# EAGLE board Boards (EAGLE 6.1)
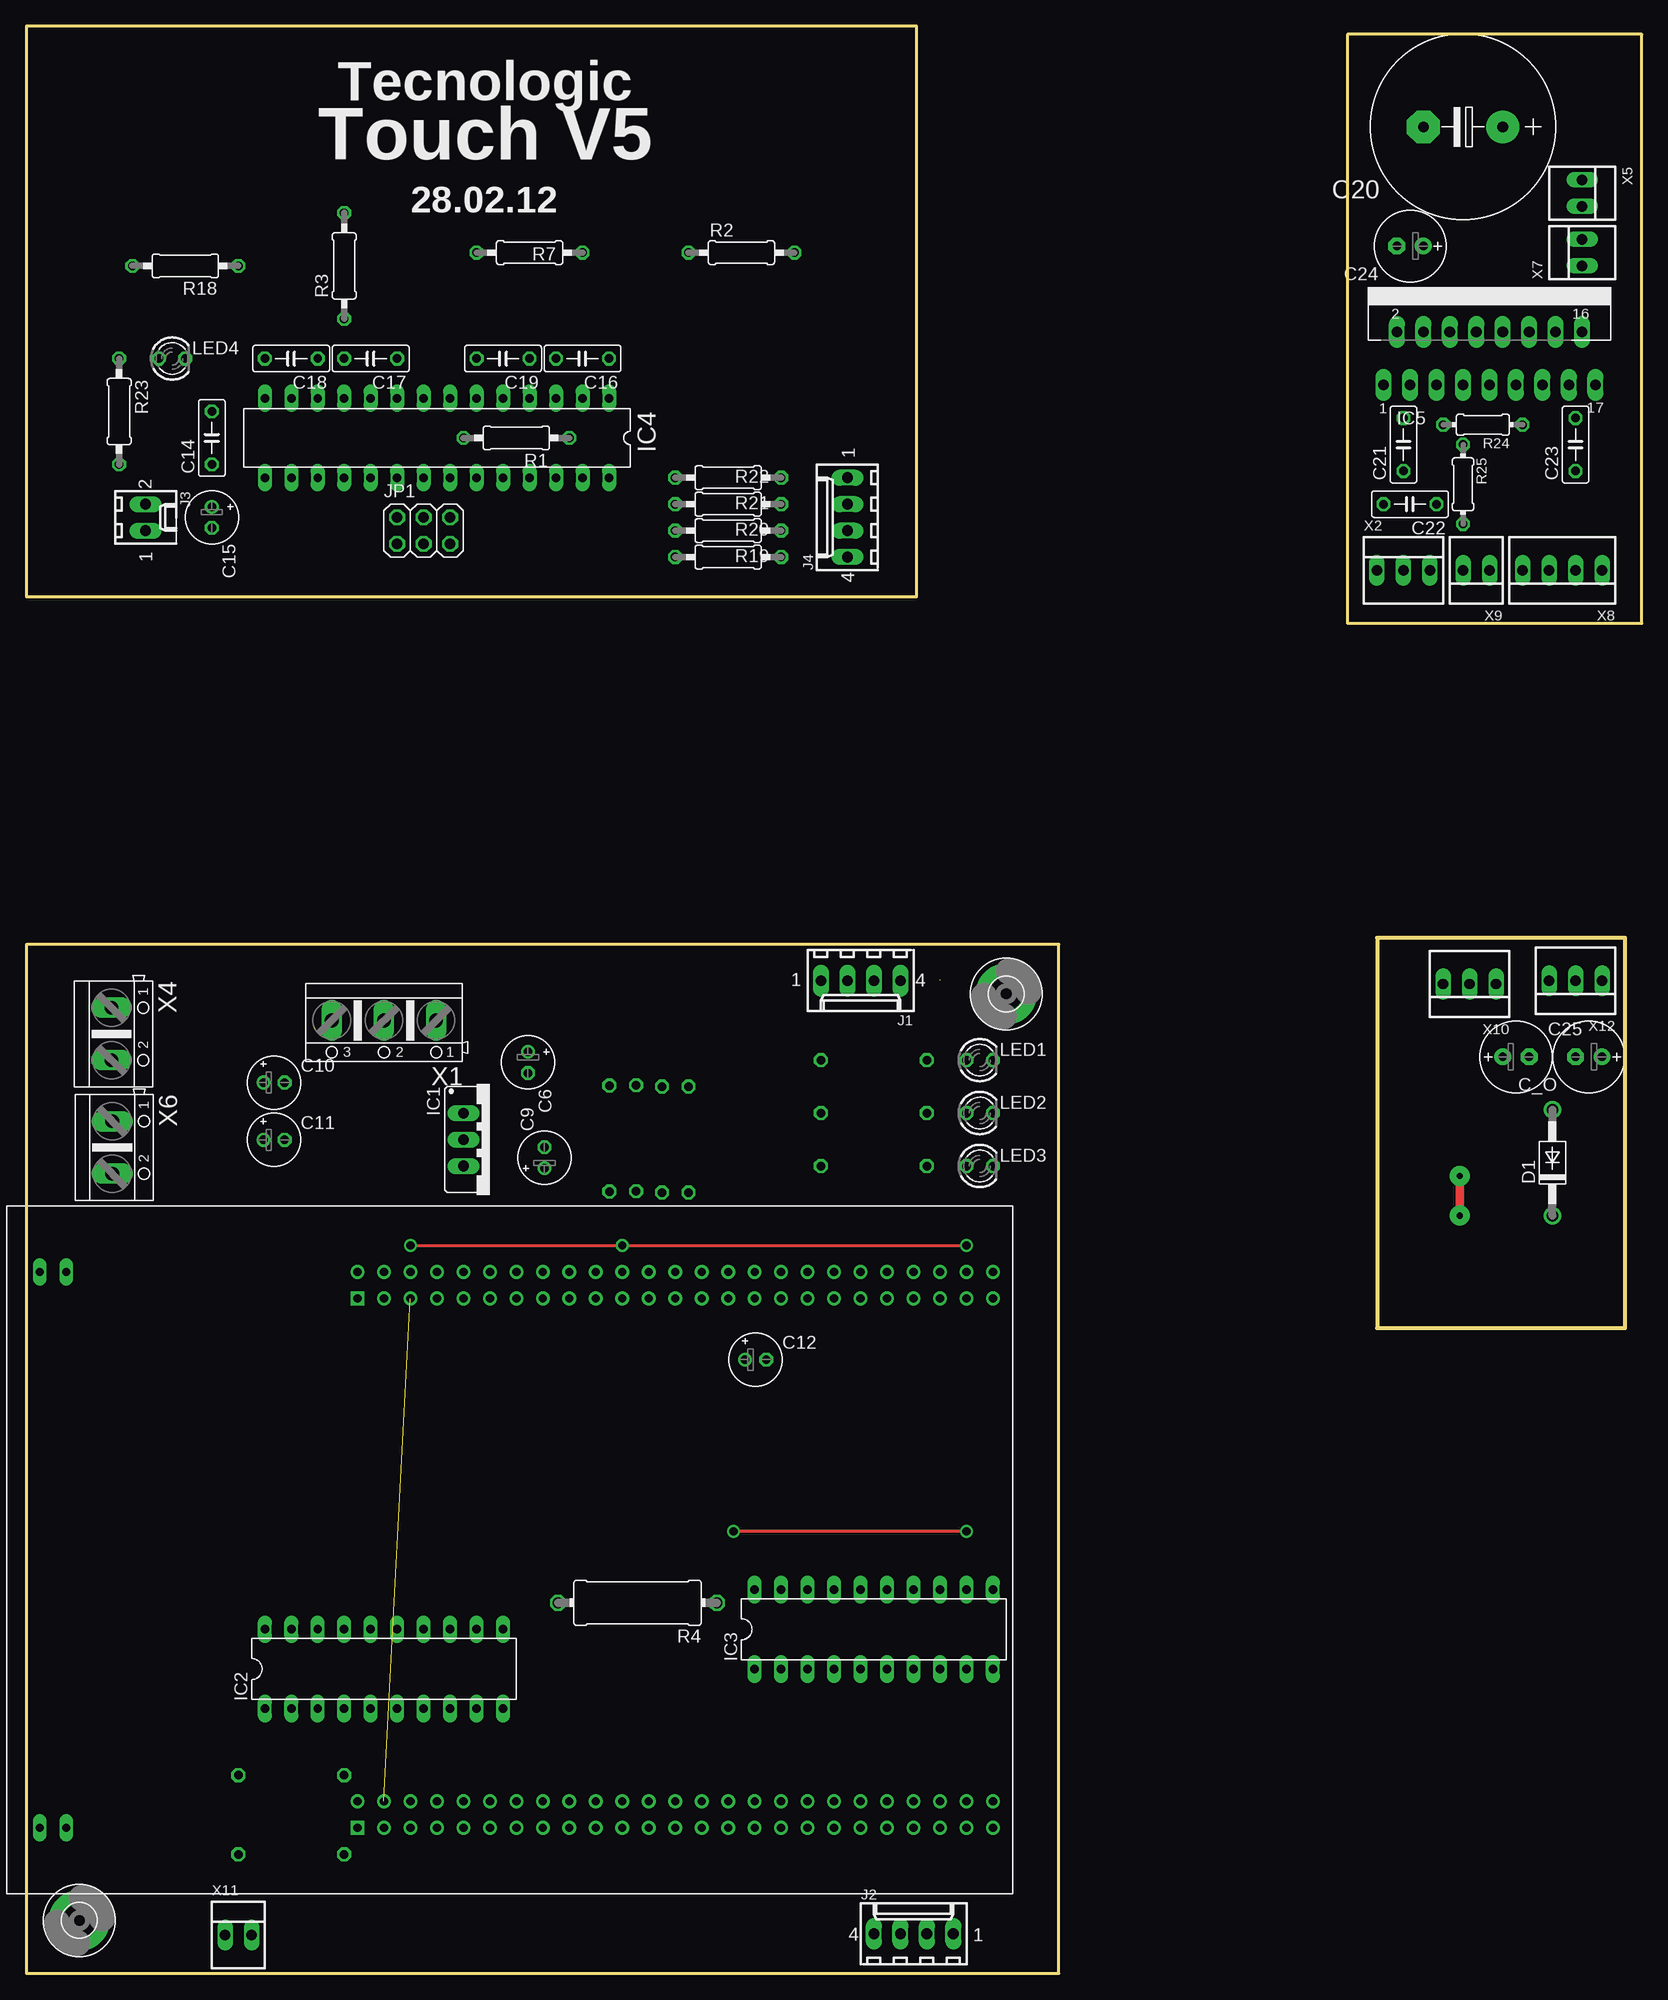
[diagram p0: board, top side]
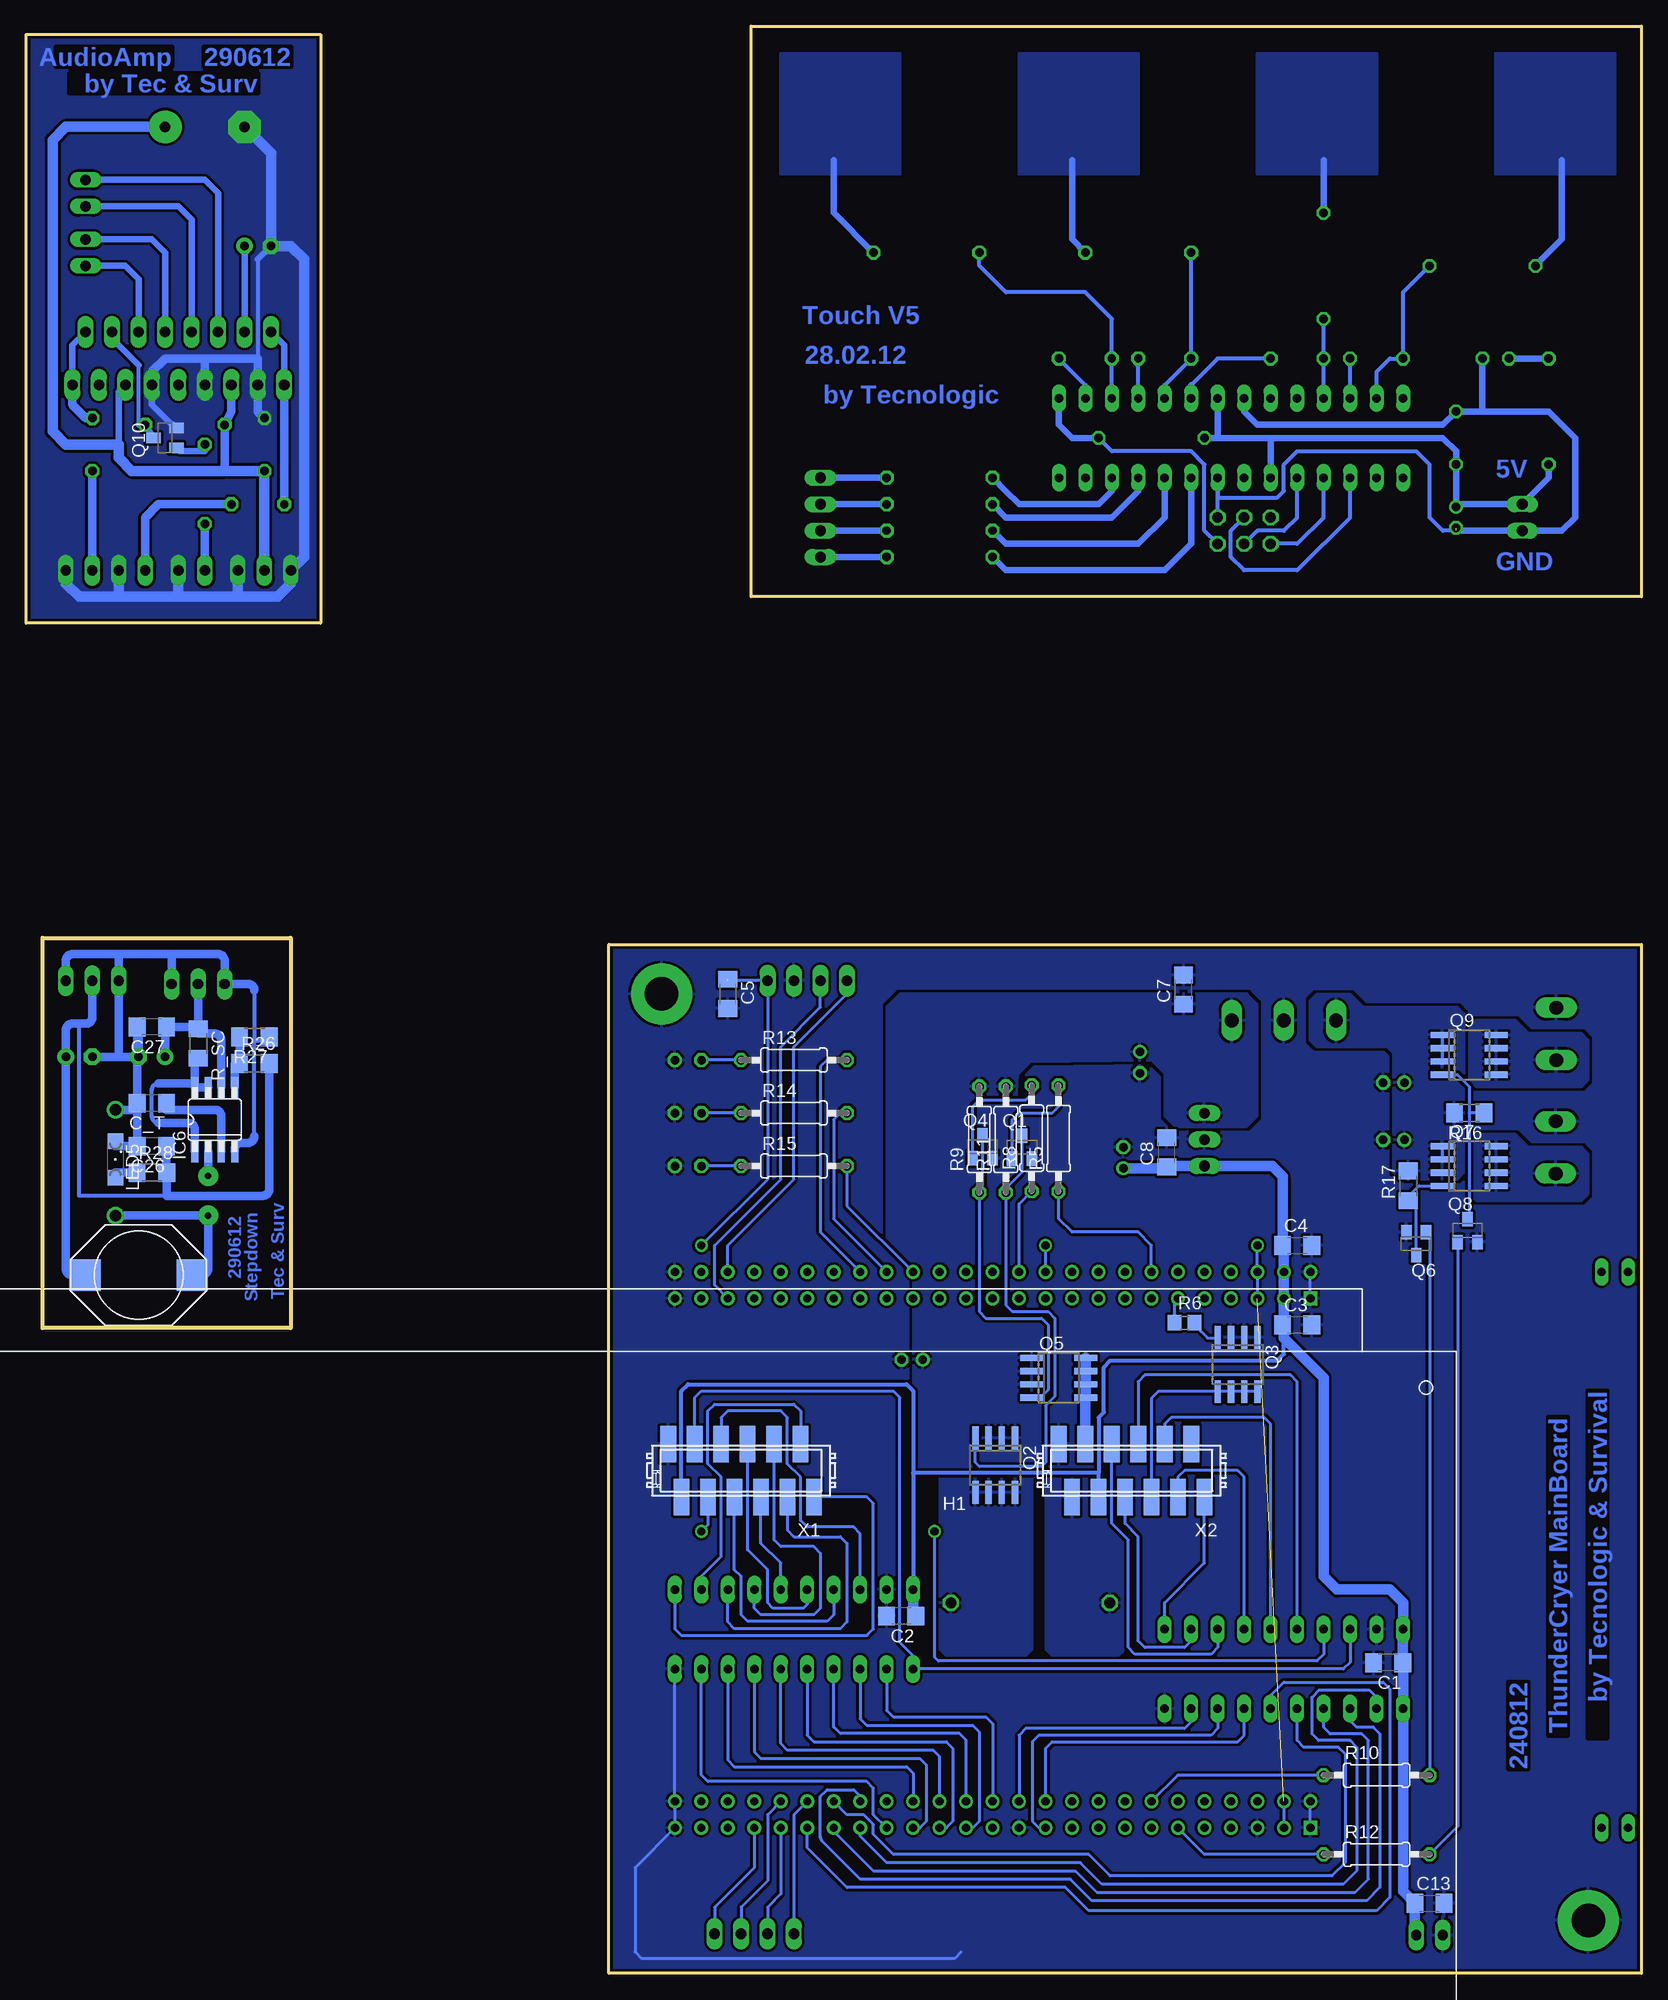
[diagram p1: board, bottom side, seen from below]

Size 154.94 x 186.84 mm. Coordinates in mm from the lower left corner, seen from the top.
Outline: 0,0 99.04,0 99.04,98.73 0,98.73 0,0
Outline: 0,132.08 85.39,132.08 85.39,186.84 0,186.84 0,132.08
Outline: 154.94,129.54 154.94,186.03 126.69,186.03 126.69,129.54 154.94,129.54
Outline: 153.35,61.91 153.35,99.36 129.55,99.36 129.55,61.91 153.35,61.91
Copper layers (1*16): Top 0.035mm / dielectric 1.5mm / Bottom 0.035mm
Design rules: minimum track width 8mil, minimum drill 0.6mm, track to track 10mil, track to pad 10mil, pad to pad 10mil, via to via 10mil, smd to smd 10mil, copper to edge 10mil, drill to drill 10mil, minimum pad ring 10mil, minimum via ring 8mil, stop-mask expansion 2mil, vias tented up to drill 100mil, thermal gap 10mil

## Footprints (pad centres in the part's own frame; a part is rotated, then mirrored left to right if it is on the bottom)
C1206 = smd 1.6 x 1.8: 1 -1.4,0; 2 1.4,0
E2-5 = drill 0.813 pad 1.27: + -1.016,0 | drill 0.813 pad 1.27 octagon: - 1.016,0
C050-025X075 = drill 0.813 octagon: 1 -2.54,0; 2 2.54,0
E7,5-18 = drill 1.016 pad 3.15: + -3.81,0 | drill 1.016 pad 3.15 octagon: - 3.81,0
E2,5-7 = drill 0.813 pad 1.6: + -1.27,0 | drill 0.813 pad 1.6 octagon: - 1.27,0
DO41-10 = drill 1.118: A 5.08,0; C -5.08,0
YL24012-70-MICROMATCH = smd 1.5 x 3.5: 1 75.565,8.89; 2 74.295,13.97; 3 73.025,8.89; 4 71.755,13.97; 5 70.485,8.89; 6 69.215,13.97; 7 67.945,8.89; 8 66.675,13.97; 9 65.405,8.89; 10 64.135,13.97; 11 62.865,8.89; 12 61.595,13.97; 13 38.1,8.89; 14 36.83,13.97; 15 35.56,8.89; 16 34.29,13.97; 17 33.02,8.89; 18 31.75,13.97; 19 30.48,8.89; 20 29.21,13.97; 21 27.94,8.89; 22 26.67,13.97; 23 25.4,8.89; 24 24.13,13.97
3,2-PAD = drill 3.2 pad 5.842: B3,2 0,0
78XXS = drill 1.016 long: GND 0,-2.54; IN -2.54,-2.54; OUT 2.54,-2.54
DIL20 = drill 0.813 long: 1 -11.43,-3.81; 2 -8.89,-3.81; 3 -6.35,-3.81; 4 -3.81,-3.81; 5 -1.27,-3.81; 6 1.27,-3.81; 7 3.81,-3.81; 8 6.35,-3.81; 9 8.89,-3.81; 10 11.43,-3.81; 11 11.43,3.81; 12 8.89,3.81; 13 6.35,3.81; 14 3.81,3.81; 15 1.27,3.81; 16 -1.27,3.81; 17 -3.81,3.81; 18 -6.35,3.81; 19 -8.89,3.81; 20 -11.43,3.81
DIL28-3 = drill 0.813 long: 1 -16.51,-3.81; 2 -13.97,-3.81; 3 -11.43,-3.81; 4 -8.89,-3.81; 5 -6.35,-3.81; 6 -3.81,-3.81; 7 -1.27,-3.81; 8 1.27,-3.81; 9 3.81,-3.81; 10 6.35,-3.81; 11 8.89,-3.81; 12 11.43,-3.81; 13 13.97,-3.81; 14 16.51,-3.81; 15 16.51,3.81; 16 13.97,3.81; 17 11.43,3.81; 18 8.89,3.81; 19 6.35,3.81; 20 3.81,3.81; 21 1.27,3.81; 22 -1.27,3.81; 23 -3.81,3.81; 24 -6.35,3.81; 25 -8.89,3.81; 26 -11.43,3.81; 27 -13.97,3.81; 28 -16.51,3.81
MULTIWAT-SIL17 = drill 1.016 long: 1 -10.16,-7.62; 2 -8.89,-2.54; 3 -7.62,-7.62; 4 -6.35,-2.54; 5 -5.08,-7.62; 6 -3.81,-2.54; 7 -2.54,-7.62; 8 -1.27,-2.54; 9 0,-7.62; 10 1.27,-2.54; 11 2.54,-7.62; 12 3.81,-2.54; 13 5.08,-7.62; 14 6.35,-2.54; 15 7.62,-7.62; 16 8.89,-2.54; 17 10.16,-7.62
SO8 = smd 0.66 x 2.032: 1 -1.905,-3.073; 2 -0.635,-3.073; 3 0.635,-3.073; 4 1.905,-3.073; 5 1.905,3.073; 6 0.635,3.073; 7 -0.635,3.073; 8 -1.905,3.073
6410-04 = drill 1.016 long: 1 3.81,0; 2 1.27,0; 3 -1.27,0; 4 -3.81,0
6410-02 = drill 1.016 long: 1 1.27,0; 2 -1.27,0
2X03 = drill 1.016 octagon: 1 -2.54,-1.27; 2 -2.54,1.27; 3 0,-1.27; 4 0,1.27; 5 2.54,-1.27; 6 2.54,1.27
PISM = smd 3 x 3: 1 -5.15,0; 2 5.15,0
LED3MM = drill 0.813 octagon: A -1.27,0; K 1.27,0
SML1206 = smd 1.5 x 1.5: A 1.75,0; C -1.75,0
SOT23 = smd 1 x 1.4: 1 -0.95,-1.1; 2 0.95,-1.1; 3 0,1.1
SO-08 = smd 0.6 x 2.2: 1 -1.905,-2.6; 2 -0.635,-2.6; 3 0.635,-2.6; 4 1.905,-2.6; 5 1.905,2.6; 6 0.635,2.6; 7 -0.635,2.6; 8 -1.905,2.6
SOT23-BEC = smd 1 x 1.4: B -0.95,-1.1; C 0,1.1; E 0.95,-1.1
0207/10 = drill 0.813 octagon: 1 -5.08,0; 2 5.08,0
0414/15 = drill 1.016 octagon: 1 -7.62,0; 2 7.62,0
R0805 = smd 1.3 x 1.5: 1 -0.95,0; 2 0.95,0
R1206 = smd 1.6 x 1.803: 1 -1.422,0; 2 1.422,0
0204/7 = drill 0.813 octagon: 1 -3.81,0; 2 3.81,0
AK500/3 = drill 1.321 long: 1 -5.004,0; 2 0,0; 3 5.004,0
22-23-2031 = drill 1 long: 1 -2.54,0; 2 0,0; 3 2.54,0
STM32F4_DISC = drill 0.8 square: L1 -27.94,30.48; R1 22.86,30.48 | drill 0.8: L2 -25.4,30.48; L3 -27.94,27.94; L4 -25.4,27.94; L5 -27.94,25.4; L6 -25.4,25.4; L7 -27.94,22.86; L8 -25.4,22.86; L9 -27.94,20.32; L10 -25.4,20.32; L11 -27.94,17.78; L12 -25.4,17.78; L13 -27.94,15.24; L14 -25.4,15.24; L15 -27.94,12.7; L16 -25.4,12.7; L17 -27.94,10.16; L18 -25.4,10.16; L19 -27.94,7.62; L20 -25.4,7.62; L21 -27.94,5.08; L22 -25.4,5.08; L23 -27.94,2.54; L24 -25.4,2.54; L25 -27.94,0; L26 -25.4,0; L27 -27.94,-2.54; L28 -25.4,-2.54; L29 -27.94,-5.08; L30 -25.4,-5.08; L31 -27.94,-7.62; L32 -25.4,-7.62; L33 -27.94,-10.16; L34 -25.4,-10.16; L35 -27.94,-12.7; L36 -25.4,-12.7; L37 -27.94,-15.24; L38 -25.4,-15.24; L39 -27.94,-17.78; L40 -25.4,-17.78; L41 -27.94,-20.32; L42 -25.4,-20.32; L43 -27.94,-22.86; L44 -25.4,-22.86; L45 -27.94,-25.4; L46 -25.4,-25.4; L47 -27.94,-27.94; L48 -25.4,-27.94; L49 -27.94,-30.48; L50 -25.4,-30.48; R2 25.4,30.48; R3 22.86,27.94; R4 25.4,27.94; R5 22.86,25.4; R6 25.4,25.4; R7 22.86,22.86; R8 25.4,22.86; R9 22.86,20.32; R10 25.4,20.32; R11 22.86,17.78; R12 25.4,17.78; R13 22.86,15.24; R14 25.4,15.24; R15 22.86,12.7; R16 25.4,12.7; R17 22.86,10.16; R18 25.4,10.16; R19 22.86,7.62; R20 25.4,7.62; R21 22.86,5.08; R22 25.4,5.08; R23 22.86,2.54; R24 25.4,2.54; R25 22.86,0; R26 25.4,0; R27 22.86,-2.54; R28 25.4,-2.54; R29 22.86,-5.08; R30 25.4,-5.08; R31 22.86,-7.62; R32 25.4,-7.62; R33 22.86,-10.16; R34 25.4,-10.16; R35 22.86,-12.7; R36 25.4,-12.7; R37 22.86,-15.24; R38 25.4,-15.24; R39 22.86,-17.78; R40 25.4,-17.78; R41 22.86,-20.32; R42 25.4,-20.32; R43 22.86,-22.86; R44 25.4,-22.86; R45 22.86,-25.4; R46 25.4,-25.4; R47 22.86,-27.94; R48 25.4,-27.94; R49 22.86,-30.48; R50 25.4,-30.48 | drill 0.8 long: T1 -27.94,60.96; T2 -27.94,58.42; T3 25.4,60.96; T4 25.4,58.42
AK500/2 = drill 1.321 long: 1 -2.515,0; 2 2.515,0
22-23-2021 = drill 1 long: 1 -1.27,0; 2 1.27,0
22-23-2041 = drill 1 long: 1 -3.81,0; 2 -1.27,0; 3 1.27,0; 4 3.81,0

## Placement (x,y rotation side)
C1  100n  [C1206]  24.29,29.81 180 bottom
C2  100n  [C1206]  70.99,34.29 180 bottom
C3  100n  [C1206]  33.02,62.23 0 bottom
C4  100n  [C1206]  33.02,69.85 0 bottom
C5  100n  [C1206]  87.63,93.98 270 bottom
C6  4µ7  [E2-5]  48.1,87.41 270 top
C7  100n  [C1206]  43.91,94.39 90 bottom
C8  100n  [C1206]  45.53,78.77 90 bottom
C9  4µ7  [E2-5]  49.69,78.26 90 top
C10  100µ  [E2-5]  23.75,85.47 0 top
C11  100µ  [E2-5]  23.75,79.98 0 top
C12  100µ  [E2-5]  69.95,58.9 0 top
C13  100n  [C1206]  20.32,6.73 0 bottom
C14  100n  [C050-025X075]  17.78,147.32 90 top
C15  10µ  [E2-5]  17.78,139.7 270 top
C16  47n  [C050-025X075]  53.34,154.94 180 top
C17  47n  [C050-025X075]  33.02,154.94 180 top
C18  47n  [C050-025X075]  25.4,154.94 180 top
C19  47n  [C050-025X075]  45.72,154.94 180 top
C20  2200µ  [E7,5-18]  137.79,177.16 180 top
C21  100n  [C050-025X075]  132.08,146.69 90 top
C22  220n  [C050-025X075]  132.72,140.97 180 top
C23  220n  [C050-025X075]  148.59,146.69 90 top
C24  100µ  [E2,5-7]  132.72,165.74 180 top
C25  100µ  [E2,5-7]  142.88,87.95 0 top
C26  100n  [C1206]  142.88,79.38 180 bottom
C27  100n  [C1206]  142.88,90.81 180 bottom
C_O  47µ  [E2,5-7]  149.86,87.95 180 top
C_T  [C1206]  142.88,83.5 180 bottom
D1  1N5819  [DO41-10]  146.37,77.79 90 top
H1  [YL24012-70-MICROMATCH]  17.78,59.69 180 bottom
H2  MOUNT-PAD-ROUND3.2  [3,2-PAD]  5.08,5.08 0 top
H3  MOUNT-PAD-ROUND3.2  [3,2-PAD]  93.98,93.98 0 top
IC1  78L05  [78XXS]  44.45,80.01 270 top
IC2  74AC245N  [DIL20]  34.29,29.21 0 top
IC3  74AC245N  [DIL20]  81.28,33.02 0 top
IC4  MEGA48-P  [DIL28-3]  39.37,147.32 180 top
IC5  TDA1554Q  [MULTIWAT-SIL17]  140.34,160.02 0 top
IC6  MC34063-SO  [SO8]  136.84,81.92 0 bottom
J1  DCF77  [6410-04]  80.01,95.25 180 top
J2  TOUCH_IN  [6410-04]  85.09,3.81 0 top
J3  22-27-2021-02  [6410-02]  11.43,139.7 270 top
J4  22-27-2041-04  [6410-04]  78.74,139.7 90 top
JP1  ISP  [2X03]  38.1,138.43 0 top
L1  L-EUPISM 22µH  [PISM]  144.15,66.99 0 bottom
LED1  [LED3MM]  91.44,87.63 0 top
LED2  [LED3MM]  91.44,82.55 0 top
LED3  [LED3MM]  91.44,77.47 0 top
LED4  PWR  [LED3MM]  13.97,154.94 0 top
LED5  [SML1206]  146.37,78.11 270 bottom
Q1  BSS123  [SOT23]  59.4,79.28 0 bottom
Q2  SI4427DY  [SO-08]  61.98,48.77 180 bottom
Q3  SI4466DY  [SO-08]  38.73,58.42 180 bottom
Q4  BSS123  [SOT23]  63.18,79.31 0 bottom
Q5  SI4427DY  [SO-08]  55.88,57.15 270 bottom
Q6  BSS123  [SOT23]  21.59,70.01 180 bottom
Q7  SI4427DY  [SO-08]  16.51,77.47 270 bottom
Q8  BSS123  [SOT23]  16.67,71.28 0 bottom
Q9  SI4427DY  [SO-08]  16.51,88.14 270 bottom
Q10  BC817-16SMD  [SOT23-BEC]  141.6,147.32 90 bottom
R1  10K  [0207/10]  46.99,147.32 180 top
R2  1k  [0207/10]  68.58,165.1 0 top
R3  1k  [0207/10]  30.48,163.83 90 top
R4  10R  [0414/15]  58.61,35.56 180 top
R5  1k  [0207/10]  55.91,80.11 90 bottom
R6  1k  [R0805]  43.81,62.42 0 bottom
R7  1k  [0207/10]  48.26,165.1 0 top
R8  1k  [0207/10]  58.48,80.14 90 bottom
R9  1k  [0207/10]  63.5,80.01 90 bottom
R10  1k  [0207/10]  25.4,19.02 0 bottom
R11  1k  [0207/10]  60.96,80.01 90 bottom
R12  1k  [0207/10]  25.4,11.43 0 bottom
R13  1k  [0207/10]  81.28,87.63 0 bottom
R14  1k  [0207/10]  81.28,82.55 0 bottom
R15  1k  [0207/10]  81.28,77.47 0 bottom
R16  10k  [R1206]  16.51,82.55 180 bottom
R17  10k  [R1206]  22.35,75.56 90 bottom
R18  1k  [0207/10]  15.24,163.83 180 top
R19  1k  [0207/10]  67.31,135.89 0 top
R20  1k  [0207/10]  67.31,138.43 0 top
R21  1k  [0207/10]  67.31,140.97 0 top
R22  1k  [0207/10]  67.31,143.51 0 top
R23  1k  [0207/10]  8.89,149.86 270 top
R24  1k  [0204/7]  139.7,148.59 180 top
R25  1k  [0204/7]  137.79,142.88 270 top
R26  [R1206]  133.03,87.31 0 bottom
R27  [R1206]  133.03,89.85 180 bottom
R28  [R1206]  142.88,76.83 0 bottom
R_SC  0R1  [R1206]  138.43,89.22 270 bottom
X1  PWR  [AK500/3]  34.29,91.44 180 top
X2  POWER  [22-23-2031]  132.08,134.62 0 top
X3  STM32F4_DISC  [STM32F4_DISC]  62.23,41.91 90 top
X4  OUT1  [AK500/2]  8.16,90.14 270 top
X5  OUT1  [22-23-2021]  149.22,170.81 270 top
X6  OUT2  [AK500/2]  8.22,79.25 270 top
X7  OUT2  [22-23-2021]  149.22,165.1 90 top
X8  AudioIn  [22-23-2041]  147.32,134.62 180 top
X9  !MUTE  [22-23-2021]  139.06,134.62 180 top
X10  V_In  [22-23-2031]  138.43,94.93 180 top
X11  TouchPWR  [22-23-2021]  20.32,3.68 0 top
X12  V_Out  [22-23-2031]  148.59,95.25 180 top

## Library data of the parts
C1-C27 C_O C_T R1-R28 R_SC = rcl
D1 = diode
H1 = GLCD-YL240
H2 H3 = holes
IC1 = v-reg
IC2 IC3 = 74xx-eu
IC4 = atmel
IC5 = linear2
IC6 = mc34063
J1 J2 = con-molex; OC_FARNELL: unknown; OC_NEWARK: unknown
J3 J4 = con-molex
JP1 = pinhead
L1 = Inductor-Fastron
LED1-LED5 = led
Q1 Q4 Q6 Q8 = transistor-small-signal
Q2 Q3 Q5 Q7 Q9 = transistor-power
Q10 = transistor-npn
X1 X4 X6 = con-ptr500; OC_FARNELL: unknown; OC_NEWARK: unknown
X2 X10 X12 = con-molex; MF: MOLEX; MPN: 22-23-2031; OC_FARNELL: 1462950; OC_NEWARK: 30C0862
X3 = stm32f4_disc
X5 X7 X9 X11 = con-molex; MF: MOLEX; MPN: 22-23-2021; OC_FARNELL: 1462926; OC_NEWARK: 25C3832
X8 = con-molex; MF: MOLEX; MPN: 22-23-2041; OC_FARNELL: 1462920; OC_NEWARK: 38C0355

## Nets
!CE: H1.21 IC2.15
!RD: H1.3 IC2.18 IC3.1
!RST: H1.19 IC2.16
!WR: H1.4 IC2.17
+3V3: C5.1 J1.4 X3.L3 X3.L4 X3.R5 X3.R6 X3.R22
+5V: C1.1 C2.1 C3.1 C4.1 C8.1 C9.+ C13.1 H1.2 H1.16 IC1.OUT IC2.1 IC2.20 IC3.20 X3.R3 X3.R4 X11.2
+12V: C6.+ C7.1 C12.+ IC1.IN Q2.1 Q2.2 Q2.3 Q5.1 Q5.2 Q5.3 R9.2 R11.2 X1.1
+12V1: C20.+ C21.1 IC5.5 IC5.13 R24.2 X2.2
+24V: C10.+ C11.+ Q7.1 Q7.2 Q7.3 Q9.1 Q9.2 Q9.3 R16.2 R17.2 X1.3
A0: H1.17 IC2.13
A1: H1.18 IC2.12
A2: H1.24 IC2.11
BL: H1.14 R4.2
BUZZ: H1.20 Q3.5 Q3.6 Q3.7 Q3.8
C/D: H1.22 IC2.14
D0: H1.5 IC3.18
D1: H1.6 IC3.17
D2: H1.7 IC3.16
D3: H1.8 IC3.15
D4: H1.9 IC3.14
D5: H1.10 IC3.13
D6: H1.11 IC3.12
D7: H1.12 IC3.11
DCF_DATA: J1.2 X3.R45
DCF_PON: J1.1 X3.R46
GND: C1.2 C2.2 C3.2 C4.2 C5.2 C6.- C7.2 C8.2 C9.- C10.- C11.- C12.- C13.2 H1.1 H1.13 H2.B3,2 H3.B3,2 IC1.GND IC2.10 IC2.19 IC3.10 IC3.19 J1.3 LED1.K LED2.K LED3.K Q1.2 Q3.1 Q3.2 Q3.3 Q4.2 Q6.2 Q8.2 X1.2 X3.L1 X3.L2 X3.L5 X3.L23 X3.L49 X3.L50 X3.R1 X3.R2 X3.R49 X3.R50 X4.1 X6.1 X11.1
GND1: C14.2 C15.- IC4.8 IC4.22 J3.1 JP1.6 LED4.K
GND2: C20.- C21.2 C24.- IC5.3 IC5.7 IC5.11 Q10.E X2.1 X2.3 X8.1 X8.3 X9.1
GND3: C25.- C26.2 C27.2 C_O.- C_T.2 D1.A IC6.4 LED5.C R27.1 X10.1 X10.3 X12.1 X12.3
IN_!CE: IC2.5 X3.L38
IN_!RD: IC2.2 X3.L35
IN_!RST: IC2.4 X3.L37
IN_!WR: IC2.3 X3.L36
IN_A0: IC2.7 X3.L22
IN_A1: IC2.8 X3.L21
IN_A2: IC2.9 X3.L24
IN_BL: R5.1 X3.R14
IN_BUZZ: R6.1 X3.R11
IN_C/D: IC2.6 X3.L39
IN_D0: IC3.2 X3.L26
IN_D1: IC3.3 X3.L27
IN_D2: IC3.4 X3.L28
IN_D3: IC3.5 X3.L29
IN_D4: IC3.6 X3.L30
IN_D5: IC3.7 X3.L31
IN_D6: IC3.8 X3.L32
IN_D7: IC3.9 X3.L33
IN_LED: R8.1 X3.R24
IN_OUT1: R12.1 X3.L11
IN_OUT2: R10.1 X3.L14
KEY0: R2.2
KEY1: R7.2
KEY2: R3.2
KEY3: R18.2
LED: H1.15 Q5.5 Q5.6 Q5.7 Q5.8
MISO: IC4.18 JP1.1
MOSI: IC4.17 JP1.4
N$1: R15.2 X3.R32
N$2: R14.2 X3.R34
N$3: J2.1 X3.L43
N$4: Q1.3 Q2.4 R11.1
N$5: Q2.5 Q2.6 Q2.7 Q2.8 R4.1
N$6: Q1.1 R5.2
N$7: Q4.3 Q5.4 R9.1
N$8: Q3.4 R6.2
N$9: J2.2 X3.L42
N$10: J2.3 X3.L41
N$11: Q4.1 R8.2
N$12: Q6.3 Q7.4 R17.1
N$13: Q6.1 R10.2
N$14: J2.4 X3.L40
N$15: Q8.3 Q9.4 R16.1
N$16: Q8.1 R12.2
N$17: LED1.A R13.1
N$18: LED2.A R14.1
N$19: LED3.A R15.1
N$20: J4.4 R19.2
N$21: J4.3 R20.2
N$22: J4.2 R21.2
N$23: J4.1 R22.2
N$24: LED4.A R23.1
N$25: C22.2 IC5.1 IC5.2
N$26: C23.2 IC5.16 IC5.17
N$27: C23.1 X8.2
N$28: R13.2 X3.R36
N$29: C22.1 X8.4
N$30: C24.+ IC5.4
N$31: IC5.10 X7.2
N$32: IC5.12 X7.1
N$33: IC5.8 X5.2
N$34: IC5.6 X5.1
N$35: IC5.14 Q10.C R24.1
N$36: R25.2 X9.2
N$37: Q10.B R25.1
N$38: IC6.1 IC6.7 IC6.8 R_SC.2
N$39: D1.C IC6.2 L1.2
N$40: LED5.A R28.1
N$41: IC6.5 R26.1 R27.2
N$42: C_T.1 IC6.3
OUT1: Q9.5 Q9.6 Q9.7 Q9.8 X4.2
OUT2: Q7.5 Q7.6 Q7.7 Q7.8 X6.2
OUT3: IC4.23 R19.1
OUT4: IC4.24 R20.1
OUT5: IC4.25 R21.1
OUT6: IC4.26 R22.1
RESET: IC4.1 JP1.5 R1.1
SCK: IC4.19 JP1.3
SNS0: C16.1 IC4.2
SNS1: C19.1 IC4.4
SNS2: C17.1 IC4.6
SNS3: C18.1 IC4.12
SNSK0: C16.2 IC4.3 R2.1
SNSK1: C19.2 IC4.5 R7.1
SNSK2: C17.2 IC4.11 R3.1
SNSK3: C18.2 IC4.13 R18.1
V+: C25.+ C27.1 IC6.6 R_SC.1 X10.2
VBAT: H1.23
VCC: C14.1 C15.+ IC4.7 IC4.20 J3.2 R1.2 R23.2
VCC1: C26.1 C_O.+ L1.1 R26.2 R28.2 X12.2

## Tracks (layer width: path | path; a pad name or v marks a point on that pad's centre or on a via)
!CE
  Bottom 0.305: IC2.15 35.56,52.7 36.2,53.34 45.09,53.34 45.72,52.7 H1.21
!RD
  Bottom 0.305: IC2.18 27.94,29.84 28.57,29.21 IC3.1 69.85,30.48 71.12,31.75 71.12,55.24 71.75,55.88 90.17,55.88 90.81,55.24 H1.3
!RST
  Bottom 0.305: IC2.16 33.02,56.77 33.66,57.4 47.62,57.4 48.26,56.77 H1.19
!WR  (via drill 0.8 pad 1.02)
  Top 0.305: v90.17,42.42 v67.82,42.42
  Bottom 0.305: IC2.17 30.48,30.61 31.11,29.97 67.44,29.97 67.82,30.35 v67.82,42.42 | H1.4 89.53,43.05 v90.17,42.42
+3V3  (via drill 0.8)  (2 unrouted)
  Top 0.305: v36.83,69.85 v57.15,69.85 v90.17,69.85
  Bottom 0.305: X3.R5 X3.R6 v36.83,69.85 | v90.17,69.85 83.82,76.2 J1.4 84.96,95.25 87.63,95.25 | X3.L4 X3.L3 | X3.R22 v57.15,69.85
+5V
  Bottom 0.305: 34.29,69.72 C4.1 | 22.86,29.79 C1.1 | 22.89,32.99 IC2.20 | 34.29,62.36 C3.1 34.29,62.23 | 69.85,34.29 C2.1 | 45.94,77.25 45.65,77.25 C8.1
  Bottom 0.406: H1.2 92.08,55.88 91.44,56.52 70.48,56.52 69.85,55.88 69.85,48.01 | 69.85,48.01 IC3.20 | H1.16 52.07,48.01 | 34.29,60.96 34.29,59.44 34.92,58.8 50.93,58.8 51.56,58.17 51.56,53.85 52.07,53.34 52.07,48.01 | 52.07,48.01 69.85,48.01
  Bottom 1.016: 34.29,69.72 X3.R4 X3.R3 34.29,62.36 | IC3.20 69.85,34.29 | 22.86,29.79 IC2.1 22.86,7.87 C13.1 21.72,3.81 X11.2 | C1.1 22.89,32.99 | IC2.20 22.86,35.56 24.13,36.83 29.21,36.83 30.48,38.1 30.48,57.15 34.29,60.96 34.29,62.23 | 45.94,77.25 C9.+ | C4.1 34.42,76.47 35.42,77.47 IC1.OUT 45.72,77.47 45.62,77.37 C8.1
+12V
  pour Bottom (rank 3): 57.15,48.9 57.15,60.33 57.78,60.96 69.22,60.96 69.85,60.33 69.85,48.9 69.22,48.26 57.78,48.26
  pour Bottom (rank 3): 36.83,82.28 36.83,92.98 37.83,93.98 44.72,93.98 45.72,92.98 45.72,82.28 44.72,81.28 37.83,81.28
  pour Bottom (rank 5): 44.45,93.98 71.12,93.98 72.39,92.71 72.39,69.85 69.85,67.31 69.85,59.69 57.15,59.69 57.15,62.23 58.42,63.5 62.23,63.5 63.5,64.77 63.5,73.66 63.25,77.85 64.14,78.74 64.14,83.06 63.5,83.69 63.5,83.82 59.94,83.82 59.82,86.23 58.55,87.5 46.99,87.63 45.72,86.36
+12V1
  Bottom 0.61: IC5.13 146.05,151.76 146.05,146.69
  Bottom 0.813: 135.89,144.15 R24.2 135.25,149.86 IC5.5
  Bottom 1.016: X2.2 C21.1 135.89,144.15 144.78,144.15 146.05,145.41 146.05,146.69 151.13,146.69 152.4,147.96 152.4,175.9 151.13,177.16 C20.+
+24V
  Bottom 0.305: Q9.3 Q9.2 Q9.1 | Q7.1 Q7.2
  pour Bottom (rank 3): 26.67,92.71 17.65,92.71 17.02,92.08 17.02,76.83 17.65,76.2 23.11,76.2 23.75,76.83 23.75,88.27 24.38,88.9 31.11,88.9 31.75,89.53 31.75,93.34 31.11,93.98 27.94,93.98
A0
  Bottom 0.305: IC2.13 40.64,31.27 41.27,30.64 48.58,30.64 49.21,31.27 49.21,41.59 50.8,43.18 H1.17
A1
  Bottom 0.305: IC2.12 43.18,31.91 43.81,31.27 47.62,31.27 48.26,31.91 48.26,41.91 49.53,43.18 H1.18
A2
  Bottom 0.305: IC2.11 45.72,35.56 41.91,39.37 H1.24
BL
  pour Bottom (rank 3): 50.16,48.26 56.52,48.26 57.15,47.62 57.15,31.11 56.52,30.48 50.16,30.48 49.53,31.11 49.53,47.62
BUZZ
  Bottom 0.305: Q3.8 Q3.7 Q3.6 Q3.5 46.35,55.82 46.99,55.19 H1.20
C/D
  Bottom 0.305: IC2.14 38.1,47.62 38.73,48.26 43.81,48.26 44.45,47.62 H1.22
D0
  Bottom 0.305: IC3.18 74.93,42.2 75.56,42.83 80.01,42.83 80.64,43.47 80.64,47.62 81.92,48.9 81.92,53.34 82.55,53.98 87.63,53.98 88.27,53.34 H1.5
D1
  Bottom 0.305: IC3.17 77.47,34.42 78.11,33.78 85.72,33.78 86.36,34.42 86.36,38.1 87,38.73 H1.6
D2
  Bottom 0.305: IC3.16 80.01,35.43 80.39,35.05 83.31,35.05 83.82,35.56 83.82,38.73 85.72,40.64 H1.7
D3
  Bottom 0.305: IC3.15 82.55,39.37 84.45,41.27 H1.8
D4
  Bottom 0.305: IC3.14 85.09,35.05 84.45,34.42 79.38,34.42 78.74,35.05 78.74,40.32 79.38,40.96 82.55,40.96 83.19,41.59 H1.9
D5
  Bottom 0.305: H1.10 81.92,42.55 81.28,41.91 76.83,41.91 76.2,41.27 76.2,33.72 76.83,33.08 87,33.08 87.63,33.72 IC3.13
D6
  Bottom 0.305: IC3.12 90.17,38.1 88.27,40.01 88.27,47.62 89.53,48.9 89.53,53.98 88.9,54.61 81.28,54.61 80.64,53.98 H1.11
D7
  Bottom 0.305: IC3.11 92.71,33.05 92.08,32.42 74.3,32.42 73.66,33.05 73.66,45.09 74.3,45.72 H1.12 79.53,45.72
DCF_DATA
  Bottom 0.305: X3.R45 88.9,66.04 88.9,69.85 82.55,76.2 82.55,88.9 78.74,92.71 J1.2
DCF_PON
  Bottom 0.305: X3.R46 87.63,69.85 81.28,76.2 81.28,88.9 76.2,93.98 J1.1
GND
  Bottom 0.305: X3.L1 X3.L2 | X3.R1 X3.R2 | IC3.10 X3.L50 X3.L49 96.52,10.16 96.52,2.06 95.89,1.43 65.88,1.43 65.25,2.06
  pour Bottom (rank 6): 0,99.06 99.06,99.06 99.06,0 0,0
GND1  (1 unrouted)
  Bottom 0.406: JP1.6 40.64,141.6 | 40.64,141.6 IC4.22 40.64,141.6 | 40.64,141.6 34.92,141.6 34.29,142.24 34.29,144.78 33.02,146.05 21.59,146.05 20.32,144.78 20.32,139.7 19.05,138.43 17.78,138.43
  Bottom 0.61: IC4.8 38.1,149.86 36.83,148.59 21.59,148.59 19.05,148.59 C14.2 15.24,149.86 | 15.24,149.86 10.16,149.86 8.89,149.86 6.35,147.32 6.35,139.7 7.62,138.43 J3.1 17.78,138.43 | LED4.K 15.24,149.86
GND2
  Bottom 0.406: 132.72,164.47 132.72,154.94
  Bottom 0.61: C24.- 132.72,164.47 | IC5.11 142.88,150.5 140.97,148.59 140.82,148.59 Q10.E
  Bottom 0.813: C21.2 132.72,149.86 IC5.3 132.72,154.94 137.79,154.94 | 137.79,154.94 IC5.7 | IC5.11 142.88,153.67 141.6,154.94 137.79,154.94
  Bottom 1.016: X8.1 151.13,133.35 149.86,132.08 146.05,132.08 | 146.05,132.08 X8.3 | X9.1 140.34,132.08 | 140.34,132.08 146.05,132.08 | 134.62,132.08 130.81,132.08 129.54,133.35 X2.1 128.27,135.89 128.27,164.47 129.54,165.74 C24.- 131.44,174.62 C20.- | 134.62,132.08 140.34,132.08 | 134.62,132.08 X2.3
  pour Bottom (no thermals): 126.36,129.54 126.36,186.06 154.94,186.06 154.94,129.54
GND3
  Bottom 0.406: 133.03,94.3 133.03,89.53 | 133.03,80.33 133.03,89.53 | 133.03,89.53 131.93,89.53 R27.1
  Bottom 0.813: X12.1 151.13,97.16 arc90 150.5,97.79 146.05,97.79 | 146.05,97.79 X12.3 146.05,87.95 | 140.97,97.79 136.53,97.79 arc90 135.89,97.16 X10.3 133.67,94.93 arc90 133.03,94.3 | 140.97,97.79 146.05,97.79 | 146.05,87.95 C25.- 144.15,90.81 C27.2 C_T.2 | 146.05,87.95 C_O.- | X10.1 140.97,97.79 | LED5.C 146.37,79.38 C26.2 C_T.2 | D1.A 144.28,82.87 C_T.2 | IC6.4 134.94,79.06 arc90 134.3,79.69 133.67,79.69 arc-90 133.03,80.33
IN_!CE
  Bottom 0.305: X3.L38 76.2,15.24 74.61,15.24 73.66,14.29 73.66,13.34 71.75,11.43 53.02,11.43 50.96,9.37 29.69,9.37 28.42,10.64 28.42,21.08 29.05,21.72 32.38,21.72 33.02,22.35 IC2.5
IN_!RD
  Bottom 0.305: IC2.2 25.4,26.51 26.04,27.15 30.96,27.15 31.59,26.51 31.59,22.99 30.96,22.35 27.94,22.35 27.3,21.72 27.3,9.84 28.57,8.57 51.75,8.57 53.82,10.64 72.39,10.64 74.93,13.18 X3.L35
IN_!RST
  Bottom 0.305: X3.L37 77.47,13.65 73.66,9.84 54.29,9.84 52.23,7.78 27.46,7.78 26.19,9.05 26.19,22.35 26.83,22.99 29.84,22.99 30.48,23.62 IC2.4
IN_!WR
  Bottom 0.305: X3.L36 74.93,16.99 75.56,17.62 78.11,17.62 78.74,16.99 78.74,13.12 78.55,12.67 74.93,9.05 54.77,9.05 52.7,6.99 26.35,6.99 25.08,8.26 25.08,22.99 25.72,23.62 27.3,23.62 27.94,24.26 IC2.3
IN_A0
  Bottom 0.305: X3.L22 57.15,21.59 56.52,22.23 38.73,22.23 38.1,22.86 IC2.7
IN_A1
  Bottom 0.305: IC2.8 40.64,23.5 41.27,22.86 57.78,22.86 58.42,22.23 58.42,14.61 57.78,13.97 X3.L21
IN_A2
  Bottom 0.305: IC2.9 43.18,24.13 43.81,23.5 59.05,23.5 59.69,22.86 X3.L24
IN_BL
  Bottom 0.305: X3.R14 46.99,69.85 48.26,71.12 54.61,71.12 55.88,72.39 55.88,74.99 R5.1
IN_BUZZ
  Bottom 0.305: R6.1 44.77,64.45 X3.R11
IN_C/D
  Bottom 0.305: IC2.6 35.56,26.67 34.29,27.94 24.77,27.94 24.13,27.3 24.13,7.3 25.4,6.03 53.02,6.03 55.24,8.26 76.2,8.26 80.01,12.06 X3.L39
IN_D0
  Bottom 0.305: IC3.2 72.39,25.24 71.75,24.61 62.87,24.61 62.23,23.97 X3.L26
IN_D1
  Bottom 0.305: IC3.3 74.93,24.45 74.3,23.81 64.14,23.81 63.5,23.18 63.5,14.61 64.14,13.97 X3.L27
IN_D2
  Bottom 0.305: X3.L28 64.77,22.38 65.41,23.02 76.83,23.02 77.47,23.65 IC3.4
IN_D3
  Bottom 0.305: IC3.5 80.01,22.86 79.38,22.23 66.67,22.23 66.04,21.59 66.04,14.61 66.67,13.97 X3.L29
IN_D4
  Bottom 0.305: X3.L30 67.31,20.8 67.94,21.43 81.92,21.43 82.55,22.07 IC3.6
IN_D5
  Bottom 0.305: IC3.7 85.09,21.27 84.45,20.64 69.22,20.64 68.58,20 68.58,14.61 69.22,13.97 X3.L31
IN_D6
  Bottom 0.305: IC3.8 87.63,20.48 87,19.84 70.48,19.84 69.85,19.21 X3.L32
IN_D7
  Bottom 0.305: X3.L33 73.66,15.24 73.66,17.78 74.3,18.41 89.53,18.41 90.17,19.05 IC3.9
IN_LED
  Bottom 0.305: X3.R24 59.69,73.85 R8.1
IN_OUT1
  Bottom 0.305: X3.L11 41.91,11.43 R12.1
IN_OUT2
  Bottom 0.305: R10.1 44.48,19.02 X3.L14
KEY0
  Bottom 0.61: R2.2 77.47,168.91 77.47,173.99
  pour Bottom (no thermals): 71.12,184.15 82.55,184.15 82.55,172.72 71.12,172.72
KEY1
  Bottom 0.61: R7.2 54.61,166.37 54.61,173.99
  pour Bottom (no thermals): 48.26,184.15 59.69,184.15 59.69,172.72 48.26,172.72
KEY2
  Bottom 0.61: R3.2 30.48,173.99
  pour Bottom (no thermals): 25.4,184.15 36.83,184.15 36.83,172.72 25.4,172.72
KEY3
  Bottom 0.61: R18.2 7.62,166.37 7.62,173.99
  pour Bottom (no thermals): 2.54,184.15 13.97,184.15 13.97,172.72 2.54,172.72
LED
  Bottom 0.305: 53.34,55.19 Q5.5
  Bottom 1.016: H1.15 53.34,55.19 | Q5.5 Q5.6 Q5.7 Q5.8
MISO
  Bottom 0.406: JP1.1 33.02,137.16 30.48,139.7 IC4.18
MOSI
  Bottom 0.406: JP1.4 39.37,138.43 39.37,135.89 38.1,134.62 33.02,134.62 27.94,139.7 IC4.17
N$1
  Bottom 0.305: R15.2 76.2,73.66 X3.R32
N$2
  Bottom 0.305: R14.2 76.83,82.55 77.47,81.92 77.47,72.39 X3.R34
N$3
  Bottom 0.305: X3.L43 85.09,10.16 88.9,6.35 J2.1
N$4
  Bottom 0.305: Q1.3 59.44,80.35 59.44,76.83 61.34,74.93 R11.1 60.96,64.14 60.33,63.5 56.9,63.5 56.26,62.87 56.26,55.37 57.15,54.48 57.15,49.02 57.53,48.64 63.5,48.64 63.88,49.02 Q2.4 63.88,51.44
N$5
  pour Bottom (rank 4): 59.05,48.26 66.67,48.26 67.31,47.62 67.31,31.11 66.67,30.48 59.05,30.48 58.42,31.11 58.42,47.62
N$6
  Bottom 0.305: Q1.1 60.35,81.89 59.69,82.55 56.52,82.55 55.88,83.19 55.88,85.09 55.91,85.12 R5.2
N$7
  Bottom 0.305: Q5.4 57.66,55.24 56.9,56.01 56.9,62.23 57.53,62.87 62.87,62.87 63.5,63.5 R9.1 63.5,75.31 63.18,75.63 Q4.3
N$8
  Bottom 0.305: R6.2 42.23,61.59 41.59,60.96 40.64,60.96 Q3.4
N$9
  Bottom 0.305: X3.L42 83.82,15.24 83.82,8.89 86.36,6.35 J2.2
N$10
  Bottom 0.305: X3.L41 82.55,7.62 83.82,6.35 J2.3
N$11
  Bottom 0.305: Q4.1 64.13,83.19 63.5,83.82 59.05,83.82 58.42,84.45 58.42,85.09 58.48,85.15 R8.2
N$12
  Bottom 0.305: 22.86,73.64 R17.1 | R17.1 22.35,74.56 21.35,75.56 Q7.4 | Q6.3 21.59,73.38 R17.1
N$13
  Bottom 0.305: R10.2 20.32,70.79 Q6.1
N$14
  Bottom 0.305: X3.L40 81.28,15.24 J2.4
N$15
  Bottom 0.305: Q9.4 17.65,86.23 16.51,85.09 16.51,82.55 | R16.1 16.51,82.55 | 16.51,82.55 16.51,72.54 Q8.3
N$16
  Bottom 0.305: Q8.1 17.62,14.13 R12.2
N$17
  Bottom 0.305: R13.1 LED1.A
N$18
  Bottom 0.305: R14.1 LED2.A
N$19
  Bottom 0.305: R15.1 LED3.A
N$20
  Bottom 0.61: R19.2 J4.4
N$21
  Bottom 0.61: R20.2 J4.3
N$22
  Bottom 0.61: R21.2 J4.2
N$23
  Bottom 0.61: R22.2 J4.1
N$24
  Bottom 0.61: R23.1 LED4.A
N$25
  Bottom 0.61: IC5.2 130.18,156.21 IC5.1
  Bottom 0.813: C22.2 IC5.1
N$26
  Bottom 0.61: IC5.17 150.5,156.21 IC5.16
  Bottom 0.813: C23.2 149.22,149.22 150.5,150.5 IC5.17
N$27
  Bottom 0.813: X8.2 C23.1
N$28
  Bottom 0.305: R13.2 78.11,87.63 78.74,87 78.74,71.12 X3.R36
N$29
  Bottom 0.813: X8.4 143.51,139.7 142.24,140.97 C22.1
N$30
  Bottom 0.61: IC5.4 C24.+
N$31
  Bottom 0.61: IC5.10 141.6,165.1 142.88,166.37 X7.2
N$32
  Bottom 0.61: IC5.12 144.15,162.56 145.41,163.83 X7.1
N$33
  Bottom 0.61: IC5.8 139.06,168.28 140.34,169.54 X5.2
N$34
  Bottom 0.61: IC5.6 136.53,170.81 137.79,172.09 X5.1
N$35
  Bottom 0.406: 144.15,148.59 144.15,154.31
  Bottom 0.61: Q10.C R24.1 144.15,148.59 | 144.15,154.31 146.69,156.84 IC5.14
N$36
  Bottom 0.813: R25.2 X9.2
N$37
  Bottom 0.61: Q10.B 140.19,146.05 137.79,146.05 R25.1
N$38
  Bottom 0.406: 142.24,81.6 arc90 142.88,82.23 142.88,84.77 arc90 142.24,85.41
  Bottom 0.813: IC6.7 IC6.8 138.75,85.41 | 138.75,85.41 138.75,87.95 138.43,87.95 R_SC.2 | IC6.1 138.75,80.96 arc-90 139.38,81.6 142.24,81.6 | 142.24,85.41 138.75,85.41
N$39  (via drill 0.6 pad 1.93)
  Top 0.813: v137.48,76.52 v137.48,72.71
  Bottom 0.813: L1.2 138.11,66.99 arc-90 137.48,67.63 v137.48,72.71 D1.C | IC6.2 v137.48,76.52
N$40
  Bottom 0.813: LED5.A 146.37,76.83 R28.1
N$41
  Bottom 0.813: IC6.5 134.94,87.31 R26.1 R27.2
N$42
  Bottom 0.813: IC6.3 136.21,82.23 arc-90 136.84,82.87 141.47,82.87 C_T.1
OUT1
  pour Bottom (rank 5): 5.71,90.17 10.79,90.17 12.06,91.44 15.88,91.44 16.51,90.81 16.51,85.72 15.88,85.09 5.71,85.09 5.08,85.72 5.08,89.53
  pour Bottom (rank 3): 5.71,90.17 10.79,90.17 12.06,91.44 15.88,91.44 16.51,90.81 16.51,85.72 15.88,85.09 5.71,85.09 5.08,85.72 5.08,89.53
OUT2
  pour Bottom (rank 3): 5.71,79.25 10.79,79.25 12.06,80.52 15.88,80.52 16.51,79.88 16.51,74.8 15.88,74.17 5.71,74.17 5.08,74.8 5.08,78.61
OUT3
  Bottom 0.61: IC4.23 43.18,137.16 45.72,134.62 58.42,134.62 60.96,134.62 R19.1
OUT4
  Bottom 0.61: IC4.24 45.72,139.7 48.26,137.16 59.69,137.16 60.96,137.16 R20.1
OUT5
  Bottom 0.61: IC4.25 48.26,142.24 50.8,139.7 58.42,139.7 60.96,139.7 R21.1
OUT6
  Bottom 0.61: IC4.26 50.8,142.24 52.07,140.97 59.69,140.97 60.96,142.24 R22.1
RESET
  Bottom 0.406: JP1.5 41.91,138.43 41.91,144.78 43.18,146.05 50.8,146.05 R1.1
  Bottom 0.61: IC4.1 55.88,148.59 54.61,147.32 R1.1
SCK
  Bottom 0.406: JP1.3 36.83,138.43 34.29,138.43 33.02,139.7 IC4.19
SNS0
  Bottom 0.406: IC4.2 53.34,152.4 C16.1
SNS1
  Bottom 0.406: IC4.4 C19.1
SNS2
  Bottom 0.406: C17.1 40.64,154.94 43.18,152.4
  Bottom 0.61: 43.18,152.4 IC4.6
SNS3
  Bottom 0.406: IC4.12 C18.1
SNSK0
  Bottom 0.406: IC4.3 C16.2 50.8,158.75 53.34,161.29 60.96,161.29 63.5,163.83 R2.1
SNSK1
  Bottom 0.406: IC4.5 45.72,152.4 C19.2 43.18,161.29 R7.1
SNSK2
  Bottom 0.406: IC4.11 C17.2 R3.1
SNSK3
  Bottom 0.406: IC4.13 25.4,153.67 24.13,154.94 C18.2 22.86,161.29 R18.1
V+
  Bottom 0.813: IC6.6 136.21,89.53 arc-90 136.84,90.17 138.43,90.17 R_SC.1 | C25.+ 141.6,90.81 C27.1 138.43,90.81 R_SC.1 | X10.2 R_SC.1
VCC
  Bottom 0.61: R1.2 40.64,147.32 | 40.64,147.32 35.56,147.32 | 35.56,147.32 21.59,147.32 19.05,147.32 17.78,146.05 C14.1 17.78,140.97 | IC4.7 40.64,147.32 | IC4.20 35.56,147.32 | 17.78,140.97 C15.+ | 17.78,140.97 J3.2 8.89,143.51 R23.2
VCC1
  Bottom 0.406: 141.45,74.61 149.86,74.61 149.86,91.12
  Bottom 0.813: L1.1 150.5,66.99 arc90 151.13,67.63 C_O.+ 151.13,90.49 arc90 150.5,91.12 149.86,91.12 149.22,91.12 arc-90 148.59,91.76 X12.2 | C26.1 141.47,78.11 R28.2 141.45,74.61 132.25,74.61 arc-90 131.61,75.25 R26.2

## Text on the board
Bottom: 290612 | AudioAmp | by Tec & Surv | Touch V5 | 28.02.12 | by Tecnologic | 5V | GND | Tec & Surv | Stepdown | 290612 | by Tecnologic & Survival | ThunderCryer MainBoard | 240812
tNames: Tecnologic | Touch V5 | 28.02.12
bRestrict: -> | <- | -> | <-